# EAGLE board led-matrix-headers-extender-board (EAGLE 9.1.0)
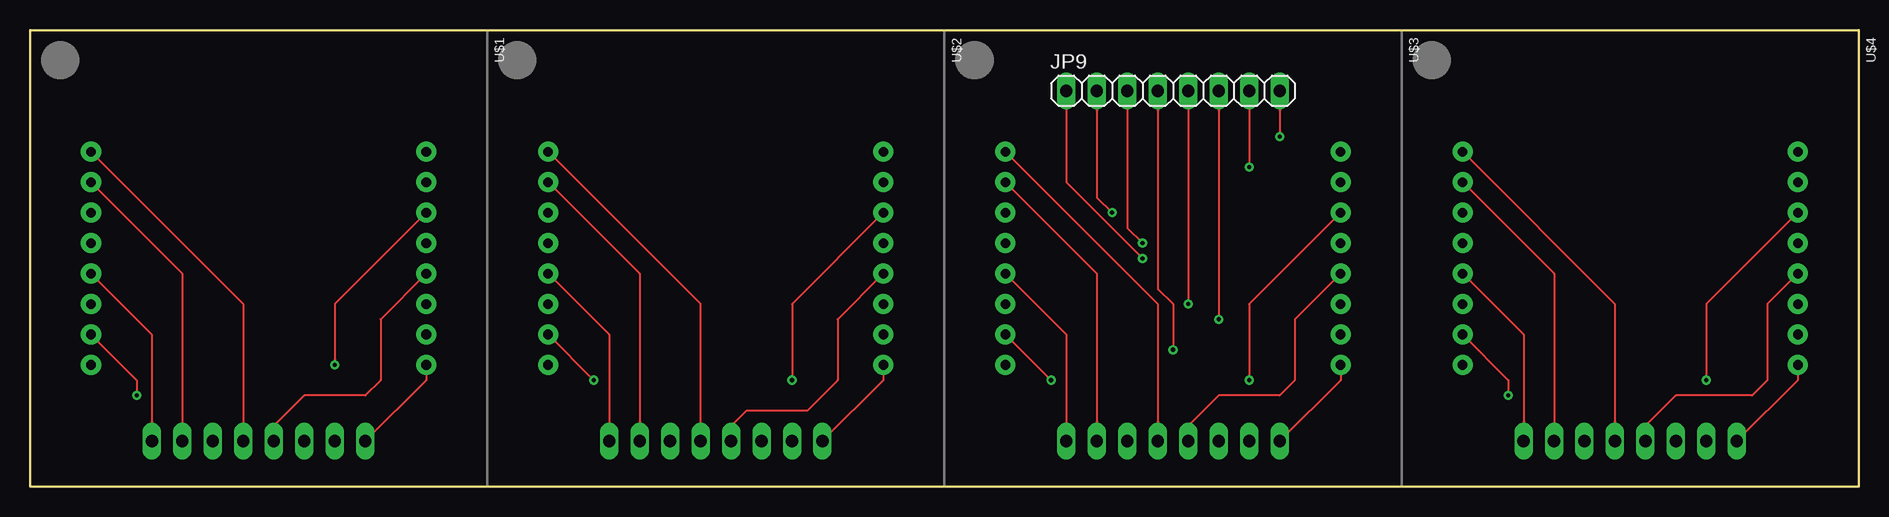
[diagram p0: board, top side]
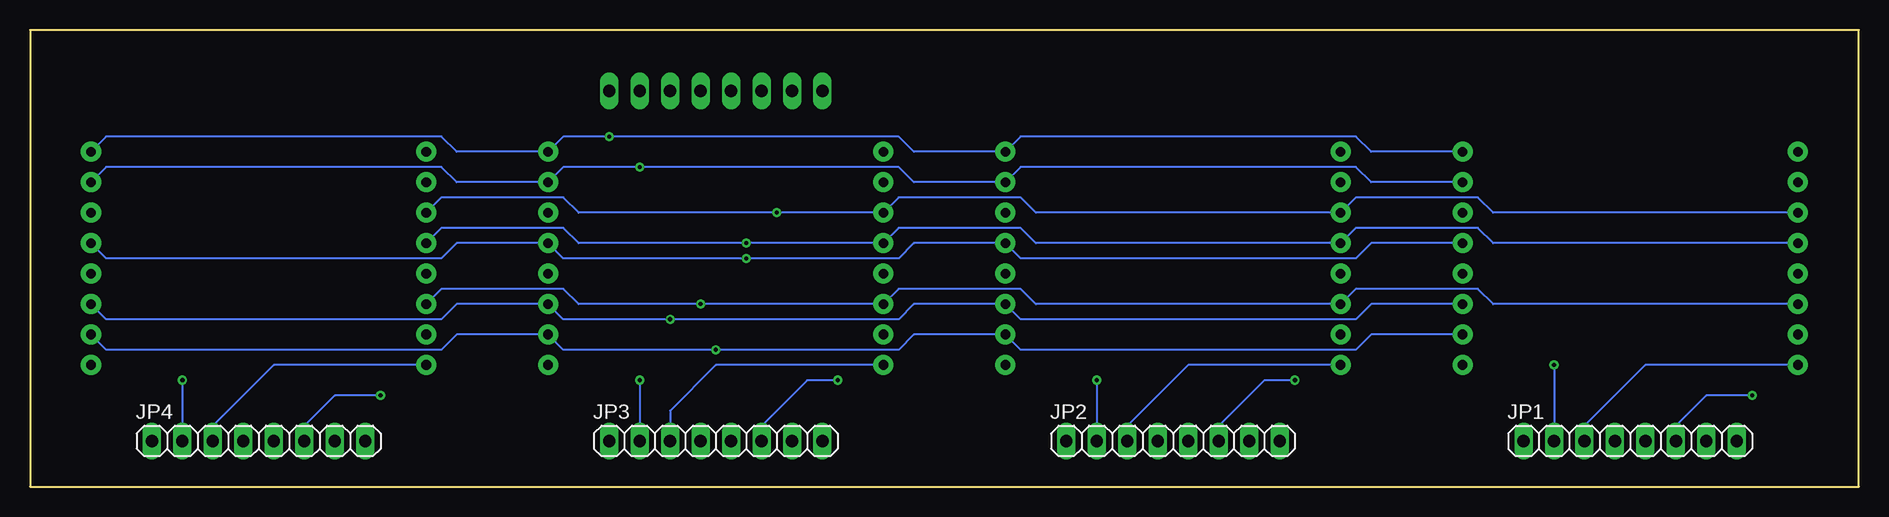
[diagram p1: board, bottom side, seen from below]

Size 152.4 x 38.1 mm. Coordinates in mm from the lower left corner, seen from the top.
Outline: 0,0 0,38.1 152.4,38.1 152.4,0 0,0
Copper layers (1*16): Top 0.035mm / dielectric 1.5mm / Bottom 0.035mm
Design rules "default": minimum track width 6mil, minimum drill 0.35mm, track to track 6mil, track to pad 6mil, pad to pad 6mil, via to via 6mil, smd to smd 6mil, copper to edge 40mil, drill to drill 6mil, minimum pad ring 10mil, minimum via ring 8mil, stop-mask expansion 4mil, vias tented up to drill 0mil, thermal gap 10mil

## Footprints (pad centres in the part's own frame; a part is rotated, then mirrored left to right if it is on the bottom)
1X08 = drill 1.016 long: 1 -8.89,0; 2 -6.35,0; 3 -3.81,0; 4 -1.27,0; 5 1.27,0; 6 3.81,0; 7 6.35,0; 8 8.89,0
SEGMENT_TC15-11SRWA = drill 0.8 pad 1.676: 1 -8.89,-13.97; 2 -6.35,-13.97; 3 -3.81,-13.97; 4 -1.27,-13.97; 5 1.27,-13.97; 6 3.81,-13.97; 7 6.35,-13.97; 8 8.89,-13.97; 9 8.89,13.97; 10 6.35,13.97; 11 3.81,13.97; 12 1.27,13.97; 13 -1.27,13.97; 14 -3.81,13.97; 15 -6.35,13.97; 16 -8.89,13.97

## Placement (x,y rotation side)
JP1  [1X08]  19.05,3.81 0 bottom
JP2  [1X08]  57.15,3.81 0 bottom
JP3  [1X08]  95.25,3.81 0 bottom
JP4  [1X08]  133.35,3.81 0 bottom
JP9  [1X08]  95.25,33.02 0 top
U$1  ANODEROW_TC15_11SRWA  [SEGMENT_TC15-11SRWA]  19.05,19.05 270 top
U$2  ANODEROW_TC15_11SRWA  [SEGMENT_TC15-11SRWA]  57.15,19.05 270 top
U$3  ANODEROW_TC15_11SRWA  [SEGMENT_TC15-11SRWA]  95.25,19.05 270 top
U$4  ANODEROW_TC15_11SRWA  [SEGMENT_TC15-11SRWA]  133.35,19.05 270 top

## Library data of the parts
JP1-JP4 JP9 = pinhead
U$1-U$4 = microbuilder

## Nets
N$1: JP1.1 U$1.9
N$2: JP1.2 U$1.14
N$3: JP1.3 U$1.8
N$4: JP1.4 U$1.12
N$5: JP1.5 U$1.1
N$6: JP1.6 U$1.7
N$7: JP1.7 U$1.2
N$8: JP1.8 U$1.5
N$9: JP2.1 U$2.9
N$10: JP2.2 U$2.14
N$11: JP2.3 U$2.8
N$12: JP2.4 U$2.12
N$13: JP2.5 U$2.1
N$14: JP2.6 U$2.7
N$15: JP2.7 U$2.2
N$16: JP2.8 U$2.5
N$17: JP3.1 U$3.9
N$18: JP3.2 U$3.14
N$19: JP3.3 U$3.8
N$20: JP3.4 U$3.12
N$21: JP3.5 U$3.1
N$22: JP3.6 U$3.7
N$23: JP3.7 U$3.2
N$24: JP3.8 U$3.5
N$25: JP4.1 U$4.9
N$26: JP4.2 U$4.14
N$27: JP4.3 U$4.8
N$28: JP4.4 U$4.12
N$29: JP4.5 U$4.1
N$30: JP4.6 U$4.7
N$31: JP4.7 U$4.2
N$32: JP4.8 U$4.5
N$33: JP9.1 U$1.13 U$2.13 U$3.13 U$4.13
N$34: JP9.2 U$1.3 U$2.3 U$3.3 U$4.3
N$35: JP9.3 U$1.4 U$2.4 U$3.4 U$4.4
N$36: JP9.4 U$1.10 U$2.10 U$3.10 U$4.10
N$37: JP9.5 U$1.6 U$2.6 U$3.6 U$4.6
N$38: JP9.6 U$1.11 U$2.11 U$3.11 U$4.11
N$39: JP9.7 U$1.15 U$2.15 U$3.15 U$4.15
N$40: JP9.8 U$1.16 U$2.16 U$3.16 U$4.16

## Tracks (layer width: path | path; a pad name or v marks a point on that pad's centre or on a via)
N$1
  Top 0.152: U$1.9 33.02,8.89 JP1.1
N$2  (via drill 0.35)
  Top 0.152: U$1.14 25.4,15.24 v25.4,10.16
  Bottom 0.152: v25.4,10.16 JP1.2
N$3
  Bottom 0.152: U$1.8 17.78,10.16 22.86,5.08 JP1.3
N$4
  Top 0.152: JP1.4 20.32,5.08 22.86,7.62 27.94,7.62 29.21,8.89 29.21,13.97 U$1.12
N$5
  Top 0.152: U$1.1 17.78,15.24 JP1.5
N$6  (via drill 0.35)
  Top 0.152: U$1.7 8.89,8.89 v8.89,7.62
  Bottom 0.152: v8.89,7.62 12.7,7.62 15.24,5.08 JP1.6
N$7
  Top 0.152: U$1.2 12.7,17.78 JP1.7
N$8
  Top 0.152: U$1.5 10.16,12.7 JP1.8
N$9
  Top 0.152: U$2.9 71.12,8.89 JP2.1
N$10  (via drill 0.35)
  Top 0.152: U$2.14 63.5,15.24 v63.5,8.89
  Bottom 0.152: v63.5,8.89 JP2.2
N$11
  Bottom 0.152: JP2.3 60.96,5.08 55.88,10.16 U$2.8
N$12
  Top 0.152: U$2.12 67.31,13.97 67.31,8.89 64.77,6.35 59.69,6.35 58.42,5.08 JP2.4
N$13
  Top 0.152: JP2.5 55.88,15.24 U$2.1
N$14  (via drill 0.35)
  Top 0.152: U$2.7 v46.99,8.89
  Bottom 0.152: v46.99,8.89 49.53,8.89 53.34,5.08 JP2.6
N$15
  Top 0.152: U$2.2 50.8,17.78 JP2.7
N$16
  Top 0.152: U$2.5 48.26,12.7 JP2.8
N$17
  Top 0.152: U$3.9 109.22,8.89 JP3.1
N$18  (via drill 0.35)
  Top 0.152: U$3.14 101.6,15.24 v101.6,8.89
  Bottom 0.152: v101.6,8.89 JP3.2
N$19
  Bottom 0.152: U$3.8 95.25,10.16 99.06,6.35 JP3.3
N$20
  Top 0.152: U$3.12 105.41,13.97 105.41,10.16 105.41,8.89 104.14,7.62 99.06,7.62 97.79,6.35 96.52,5.08 JP3.4
N$21
  Top 0.152: U$3.1 93.98,15.24 JP3.5
N$22  (via drill 0.35)
  Top 0.152: U$3.7 v85.09,8.89
  Bottom 0.152: v85.09,8.89 87.63,8.89 91.44,5.08 JP3.6
N$23
  Top 0.152: U$3.2 88.9,17.78 JP3.7
N$24
  Top 0.152: U$3.5 86.36,12.7 JP3.8
N$25
  Top 0.152: U$4.9 147.32,8.89 JP4.1
N$26  (via drill 0.35)
  Top 0.152: U$4.14 139.7,15.24 v139.7,8.89
  Bottom 0.152: v139.7,8.89 JP4.2
N$27
  Bottom 0.152: U$4.8 132.08,10.16 137.16,5.08 JP4.3
N$28
  Top 0.152: U$4.12 144.78,15.24 144.78,8.89 143.51,7.62 137.16,7.62 134.62,5.08 JP4.4
N$29
  Top 0.152: U$4.1 132.08,15.24 JP4.5
N$30  (via drill 0.35)
  Top 0.152: U$4.7 123.19,8.89 v123.19,7.62
  Bottom 0.152: v123.19,7.62 127,7.62 129.54,5.08 JP4.6
N$31
  Top 0.152: U$4.2 127,17.78 JP4.7
N$32
  Top 0.152: U$4.5 124.46,12.7 JP4.8
N$33  (via drill 0.35)
  Top 0.152: JP9.1 86.36,25.4 v92.71,19.05
  Bottom 0.152: U$1.13 40.64,20.32 41.91,19.05 69.85,19.05 U$2.13 78.74,20.32 80.01,19.05 v92.71,19.05 107.95,19.05 U$3.13 116.84,20.32 118.11,19.05 146.05,19.05 U$4.13
N$34  (via drill 0.35)
  Top 0.152: JP9.2 88.9,24.13 v90.17,22.86
  Bottom 0.152: U$1.3 30.48,22.86 31.75,24.13 41.91,24.13 U$2.3 68.58,22.86 69.85,24.13 80.01,24.13 U$3.3 v90.17,22.86 106.68,22.86 107.95,24.13 118.11,24.13 U$4.3
N$35  (via drill 0.35)
  Top 0.152: JP9.3 91.44,21.59 v92.71,20.32
  Bottom 0.152: U$1.4 30.48,20.32 31.75,21.59 41.91,21.59 U$2.4 68.58,20.32 69.85,21.59 80.01,21.59 U$3.4 v92.71,20.32 106.68,20.32 107.95,21.59 118.11,21.59 U$4.4
N$36  (via drill 0.35)
  Top 0.152: JP9.4 93.98,16.51 95.25,15.24 v95.25,11.43
  Bottom 0.152: U$1.10 40.64,12.7 41.91,11.43 69.85,11.43 U$2.10 78.74,12.7 80.01,11.43 v95.25,11.43 107.95,11.43 U$3.10 116.84,12.7 118.11,11.43 146.05,11.43 U$4.10
N$37  (via drill 0.35)
  Top 0.152: JP9.5 v96.52,15.24
  Bottom 0.152: U$1.6 30.48,15.24 31.75,16.51 41.91,16.51 U$2.6 68.58,15.24 69.85,16.51 80.01,16.51 U$3.6 v96.52,15.24 106.68,15.24 107.95,16.51 118.11,16.51 U$4.6
N$38  (via drill 0.35)
  Top 0.152: JP9.6 v99.06,13.97
  Bottom 0.152: U$1.11 40.64,15.24 41.91,13.97 69.85,13.97 U$2.11 78.74,15.24 80.01,13.97 v99.06,13.97 107.95,13.97 U$3.11 116.84,15.24 118.11,13.97 146.05,13.97 U$4.11
N$39  (via drill 0.35)
  Top 0.152: JP9.7 v101.6,26.67
  Bottom 0.152: U$1.15 40.64,25.4 41.91,26.67 69.85,26.67 U$2.15 78.74,25.4 80.01,26.67 v101.6,26.67 107.95,26.67 U$3.15 116.84,25.4 118.11,26.67 146.05,26.67 U$4.15
N$40  (via drill 0.35)
  Top 0.152: JP9.8 v104.14,29.21
  Bottom 0.152: U$1.16 40.64,27.94 41.91,29.21 69.85,29.21 U$2.16 78.74,27.94 80.01,29.21 v104.14,29.21 107.95,29.21 U$3.16 116.84,27.94 118.11,29.21 146.05,29.21 U$4.16